# EAGLE board ledblinker (EAGLE 6.4)
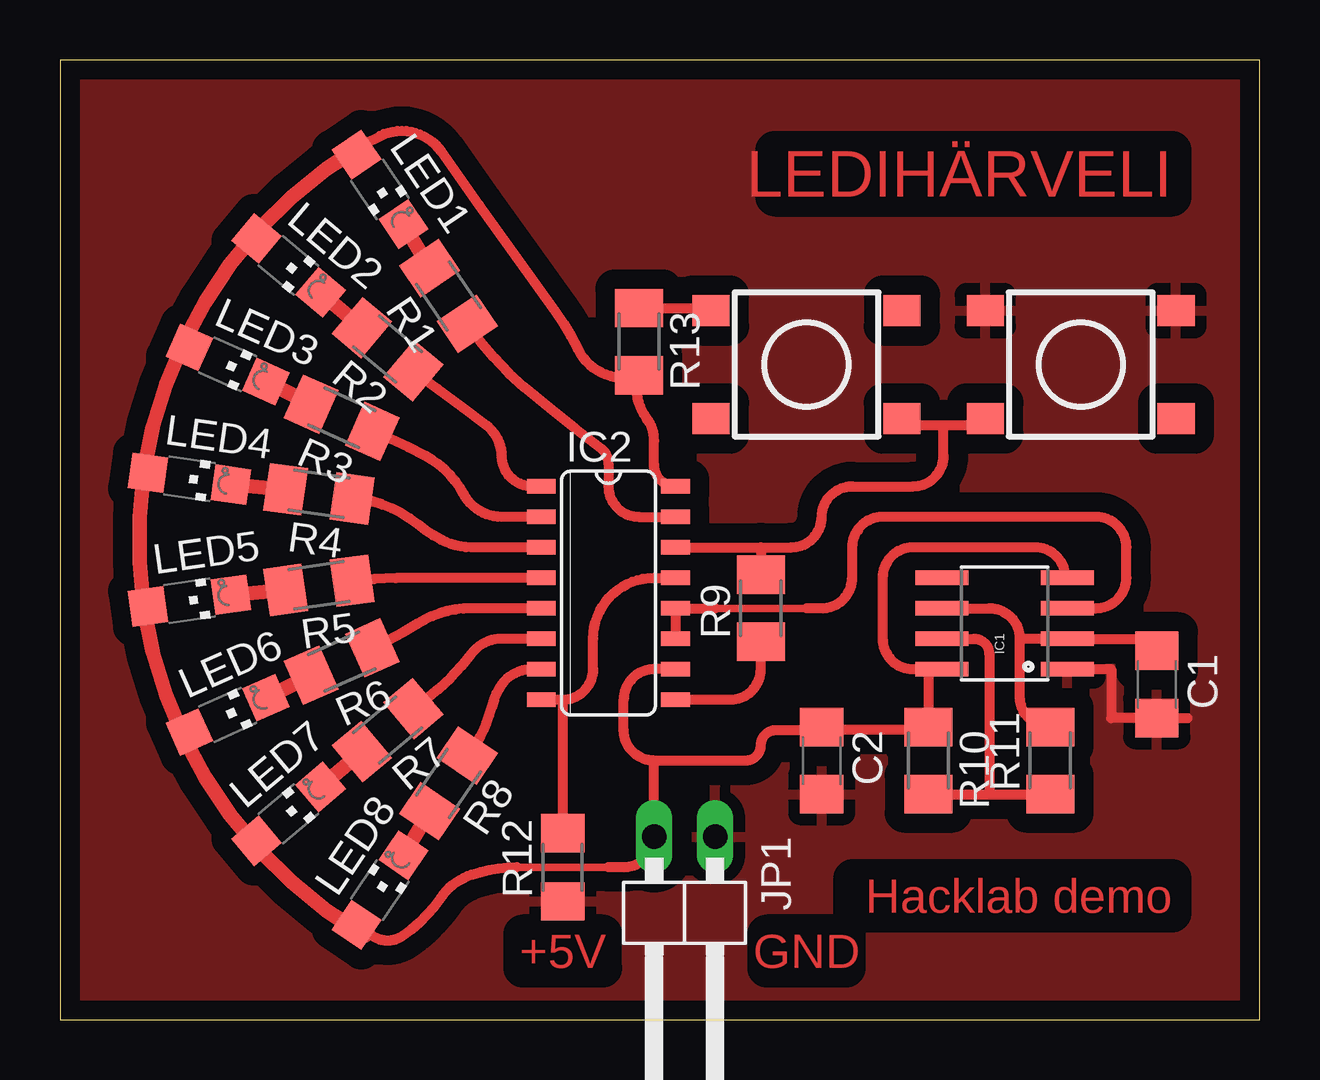
[diagram p0: board, top side]

Size 50 x 40 mm. Coordinates in mm from the lower left corner, seen from the top.
Outline: 0,0 50,0 50,40 0,40 0,0
Copper layers (1*16): Top 0.035mm / dielectric 1.5mm / Bottom 0.035mm
Design rules "default *": minimum track width 10mil, minimum drill 24mil, track to track 8mil, track to pad 8mil, pad to pad 8mil, via to via 8mil, smd to smd 8mil, copper to edge 0.25mm, drill to drill 8mil, minimum pad ring 10mil, minimum via ring 8mil, stop-mask expansion 4mil, vias tented up to drill 0mil, thermal gap 0.5mm

## Footprints (pad centres in the part's own frame; a part is rotated, then mirrored left to right if it is on the bottom)
C1206 = smd 1.6 x 1.8: 1 -1.4,0; 2 1.4,0
SO08 = smd 0.61 x 2.21: 1 -1.905,-2.616; 2 -0.635,-2.616; 3 0.635,-2.616; 4 1.905,-2.616; 5 1.905,2.616; 6 0.635,2.616; 7 -0.635,2.616; 8 -1.905,2.616
SO16 = smd 0.6 x 1.2: 1 -4.445,-2.8; 2 -3.175,-2.8; 3 -1.905,-2.8; 4 -0.635,-2.8; 5 0.635,-2.8; 6 1.905,-2.8; 7 3.175,-2.8; 8 4.445,-2.8; 9 4.445,2.8; 10 3.175,2.8; 11 1.905,2.8; 12 0.635,2.8; 13 -0.635,2.8; 14 -1.905,2.8; 15 -3.175,2.8; 16 -4.445,2.8
1X02/90 = drill 1.016 long: 1 -1.27,-3.81; 2 1.27,-3.81
CHIPLED_1206 = smd 1.5 x 1.5: A 0,-1.75; C 0,1.75
M1206 = smd 1.6 x 2: 1 -1.4,0; 2 1.4,0
R1206 = smd 1.6 x 1.803: 1 -1.422,0; 2 1.422,0
TACTILE_SWITCH_TALL = smd 1.55 x 1.3: 1 -3.975,2.25; 2 3.975,2.25; 3 -3.975,-2.25; 4 3.975,-2.25

## Placement (x,y rotation side)
C1  100nF  [C1206]  45.72,13.97 270 top
C2  100nF  [C1206]  31.75,10.79 270 top
IC1  NE555D  [SO08]  39.37,16.51 90 top
IC2  74LS595D  [SO16]  22.86,17.78 270 top
JP1  [1X02/90]  26.04,3.81 180 top
LED1  [CHIPLED_1206]  13.34,34.61 214 top
LED2  [CHIPLED_1206]  9.53,31.43 230 top
LED3  [CHIPLED_1206]  6.99,27.3 246 top
LED4  [CHIPLED_1206]  5.4,22.54 262 top
LED5  [CHIPLED_1206]  5.4,17.46 278 top
LED6  [CHIPLED_1206]  6.99,12.7 294 top
LED7  [CHIPLED_1206]  9.53,8.57 310 top
LED8  [CHIPLED_1206]  13.34,5.4 326 top
R1  220  [M1206]  16.19,30.16 124 top
R2  220  [M1206]  13.65,27.94 140 top
R3  220  [M1206]  11.75,25.08 156 top
R4  220  [M1206]  10.79,21.91 172 top
R5  220  [M1206]  10.79,18.1 188 top
R6  220  [M1206]  11.75,14.92 204 top
R7  220  [M1206]  13.65,12.06 220 top
R8  220  [M1206]  16.19,9.84 236 top
R9  22k  [M1206]  29.21,17.14 90 top
R10  220k  [M1206]  36.2,10.79 270 top
R11  2.2M  [M1206]  41.27,10.79 90 top
R12  0R  [R1206]  20.95,6.35 90 top
R13  1k  [M1206]  24.13,28.26 270 top
S1  [TACTILE_SWITCH_TALL]  42.55,27.3 0 top
S3  [TACTILE_SWITCH_TALL]  31.11,27.3 180 top

## Library data of the parts
C1 C2 R1-R13 = rcl
IC1 IC2 = SparkFun
JP1 = pinhead
LED1-LED8 = led
S1 S3 = hsa

## Nets
GND: C1.2 C2.2 IC1.1 JP1.1 R12.1 S1.1 S1.2
N$1: IC2.15 R1.1
N$2: IC2.1 R2.1
N$3: IC2.2 R3.1
N$4: IC2.3 R4.1
N$5: IC2.4 R5.1
N$6: IC2.5 R6.1
N$7: IC2.6 R7.1
N$8: IC2.7 R8.1
N$9: IC2.9 R9.1
N$10: IC2.14 R9.2 S1.3 S3.1
N$11: C1.1 IC1.2 IC1.6 R11.2
N$12: IC1.3 IC2.11 IC2.12
N$13: IC1.7 R10.2 R11.1
N$14: LED1.C R1.2
N$15: LED2.C R2.2
N$16: LED3.C R3.2
N$17: LED4.C R4.2
N$18: LED5.C R5.2
N$19: LED6.C R6.2
N$20: LED7.C R7.2
N$21: LED8.C R8.2
N$22: IC2.8 IC2.13 R12.2
N$23: R13.1 S3.4
VCC: C2.1 IC1.4 IC1.8 IC2.10 IC2.16 JP1.2 LED1.A LED2.A LED3.A LED4.A LED5.A LED6.A LED7.A LED8.A R10.1 R13.2

## Tracks (layer width: path | path; a pad name or v marks a point on that pad's centre or on a via)
GND
  Top 0.406: 46.99,12.57 C1.2 43.81,12.57 43.81,14.6 IC1.1
  pour Top (isolate 0.813): -1.27,41.91 52.07,41.91 52.07,-1.27 -1.27,-1.27
N$1
  Top 0.406: IC2.15 24.13,20.96 arc-90 22.86,22.23 22.86,23.18 arc53 22.54,23.81 arc-4 19.37,26.35 arc-15 R1.1
N$2
  Top 0.406: IC2.1 19.68,22.23 arc-90 18.41,23.49 arc53 17.78,24.76 arc0 R2.1
N$3
  Top 0.406: IC2.2 18.41,20.96 arc-62 16.83,21.91 arc34 15.24,23.49 arc7 R3.1
N$4
  Top 0.406: IC2.3 17.14,19.69 arc-28 15.88,20 arc-11 14.92,20.64 arc36 R4.1
N$5
  Top 0.406: IC2.4 14.92,18.42 arc5 R5.1
N$6
  Top 0.406: IC2.5 17.14,17.14 arc32 14.92,16.51 arc-7 R6.1
N$7
  Top 0.406: IC2.6 18.41,15.87 arc53 17.14,15.24 arc-20 R7.1
N$8
  Top 0.406: IC2.7 19.68,14.6 arc53 18.41,13.97 arc21 18.1,13.33 arc-4 17.78,12.38 arc-19 R8.1
N$9
  Top 0.406: IC2.9 27.94,13.33 arc90 29.21,14.6 R9.1
N$10
  Top 0.406: IC2.14 29.21,19.69 | 29.21,19.69 R9.2 | 29.21,19.69 30.48,19.69 arc90 31.75,20.96 arc-90 33.02,22.23 35.56,22.23 arc90 36.83,23.49 36.83,24.76 | S3.1 35.09,24.76 36.83,24.76 | S1.3 38.57,24.76 36.83,24.76
N$11
  Top 0.406: IC1.6 38.73,17.14 arc-90 40.01,15.87 | 40.01,15.87 IC1.2 45.72,15.87 C1.1 | R11.2 arc-90 40.01,13.47 40.01,15.87
N$12
  Top 0.305: 27.3,17.14 31.11,17.14
  Top 0.406: IC1.3 43.18,17.14 arc90 44.45,18.42 44.45,19.69 arc90 43.18,20.96 34.29,20.96 arc90 33.02,19.69 33.02,18.42 arc-90 31.75,17.14 31.11,17.14 | IC2.11 IC2.12 27.3,17.14
N$13
  Top 0.406: R10.2 38.73,9.4 | 38.73,9.4 R11.1 | IC1.7 38.1,15.87 arc-90 38.73,15.24 38.73,9.4
N$14
  Top 0.61: R1.2 LED1.C
N$15
  Top 0.61: R2.2 LED2.C
N$16
  Top 0.61: R3.2 LED3.C
N$17
  Top 0.61: R4.2 LED4.C
N$18
  Top 0.61: R5.2 LED5.C
N$19
  Top 0.61: LED6.C R6.2
N$20
  Top 0.61: LED7.C R7.2
N$21
  Top 0.61: LED8.C R8.2
N$22
  Top 0.406: IC2.8 20.95,13.33 | 20.95,13.33 arc90 22.23,14.6 22.23,15.87 arc-90 24.77,18.42 IC2.13 | 20.95,13.33 R12.2
N$23
  Top 0.406: R13.1 27.14,29.66 S3.4
VCC
  Top 0.305: 22.86,6.35 19.05,6.35 | 12.7,36.51 LED1.A 10.48,34.92 8.57,33.02 LED2.A 6.67,31.12 5.4,28.89 LED3.A 4.76,27.62 4.13,25.72 3.81,24.13 LED4.A | LED5.A 3.81,15.87 4.45,13.65 4.76,12.38 LED6.A 5.4,11.11 6.35,9.52 7.62,7.94 LED7.A 8.57,6.99 9.21,6.03 10.48,5.08 LED8.A | 12.7,3.49 12.8,3.64
  Top 0.406: IC1.4 41.91,18.42 arc90 40.64,19.69 35.56,19.69 arc90 34.29,18.42 34.29,15.87 arc90 35.56,14.6 IC1.8 36.2,14.6 R10.1 36.2,12.07 31.75,12.07 | IC2.10 24.77,14.6 arc90 23.5,13.33 23.5,12.07 arc90 24.77,10.8 | 26.04,22.23 IC2.16 arc-90 24.77,23.12 24.77,24.13 arc37 24.45,25.08 arc-53 R13.2 arc-81 21.59,27.94 arc9 20.64,29.53 arc0 15.88,36.2 arc81 13.34,36.83 12.7,36.51 | 24.77,10.8 JP1.2 arc-90 23.5,6.35 22.86,6.35 | 24.77,10.8 28.57,10.8 arc90 29.21,11.43 arc-90 29.84,12.07 31.75,12.07 | C2.1 31.75,12.07 | LED8.A 12.8,3.64 13.02,3.49 arc69 14.29,3.49 arc21 15.88,5.08 arc-21 16.51,5.71 arc-16 17.14,6.03 arc-18 19.05,6.35
  Top 0.61: 12.7,3.49 arc-119 12.7,36.51

## Text on the board
Top: LEDIHÄRVELI | Hacklab demo | +5V | GND